# EAGLE board InductorBreakout (EAGLE 6.3)
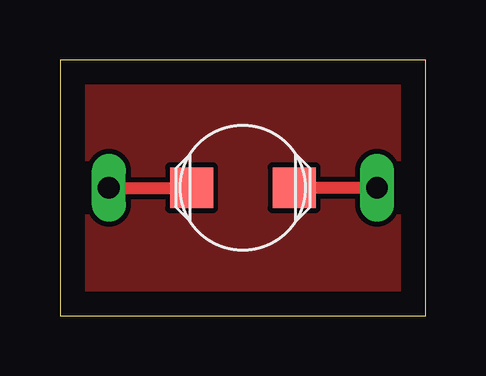
[diagram p0: board, top side]
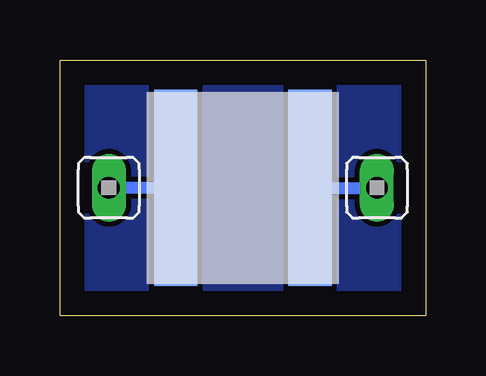
[diagram p1: board, bottom side, seen from below]

Size 15.24 x 10.67 mm. Coordinates in mm from the lower left corner, seen from the top.
Outline: 0,0 15.24,0 15.24,10.67 0,10.67 0,0
Copper layers (1*16): Top 0.035mm / dielectric 1.5mm / Bottom 0.035mm
Design rules "default *": minimum track width 10mil, minimum drill 24mil, track to track 8mil, track to pad 8mil, pad to pad 8mil, via to via 8mil, smd to smd 8mil, copper to edge 40mil, drill to drill 8mil, minimum pad ring 10mil, minimum via ring 8mil, stop-mask expansion 4mil, vias tented up to drill 0mil, thermal gap 10mil

## Footprints (pad centres in the part's own frame; a part is rotated, then mirrored left to right if it is on the bottom)
LQH55PN220MR0L = smd 1.8 x 1.7: P$1 -2.135,0; P$2 2.135,0
NRS8040T0R9NJGJ = smd 8.2 x 1.8: P$1 0,2.8; P$2 0,-2.8
SINGLE_HEADER = drill 0.914 long: P$1 0,0

## Placement (x,y rotation side)
NEWBATT  LQH55PN220MR0L  [LQH55PN220MR0L]  7.62,5.33 180 top
OLDBATT  NRS8040T0R9NJGJ  [NRS8040T0R9NJGJ]  7.62,5.33 90 bottom
U$5  SINGLE_HEADER  [SINGLE_HEADER]  2.03,5.33 90 bottom
U$6  SINGLE_HEADER  [SINGLE_HEADER]  13.21,5.33 270 bottom

## Library data of the parts
NEWBATT OLDBATT U$5 U$6 = SolarJackets_BMS

## Nets
N$3: NEWBATT.P$2 OLDBATT.P$2 U$5.P$1
N$4: NEWBATT.P$1 OLDBATT.P$1 U$6.P$1

## Tracks (layer width: path | path; a pad name or v marks a point on that pad's centre or on a via)
N$1
  pour Top: 0.51,10.16 14.73,10.16 14.73,0.51 0.51,0.51
N$2
  pour Bottom: 0.51,10.16 14.73,10.16 14.73,0.51 0.51,0.51
N$3
  Top 0.508: U$5.P$1 NEWBATT.P$2
  Bottom 0.508: OLDBATT.P$2 U$5.P$1
N$4
  Top 0.508: U$6.P$1 NEWBATT.P$1
  Bottom 0.508: OLDBATT.P$1 U$6.P$1